# Altium PCB B213.PcbDoc
Units mm, origin at the board's own origin, x right, y up, seen from the top; angles counter-clockwise.
Board outline 22 x 40 mm, 4 copper layers (Top, Layer 1, Layer 2, Bottom), stack 1.564 mm thick; 29 components, 36 nets, 121 pads, 146 vias.
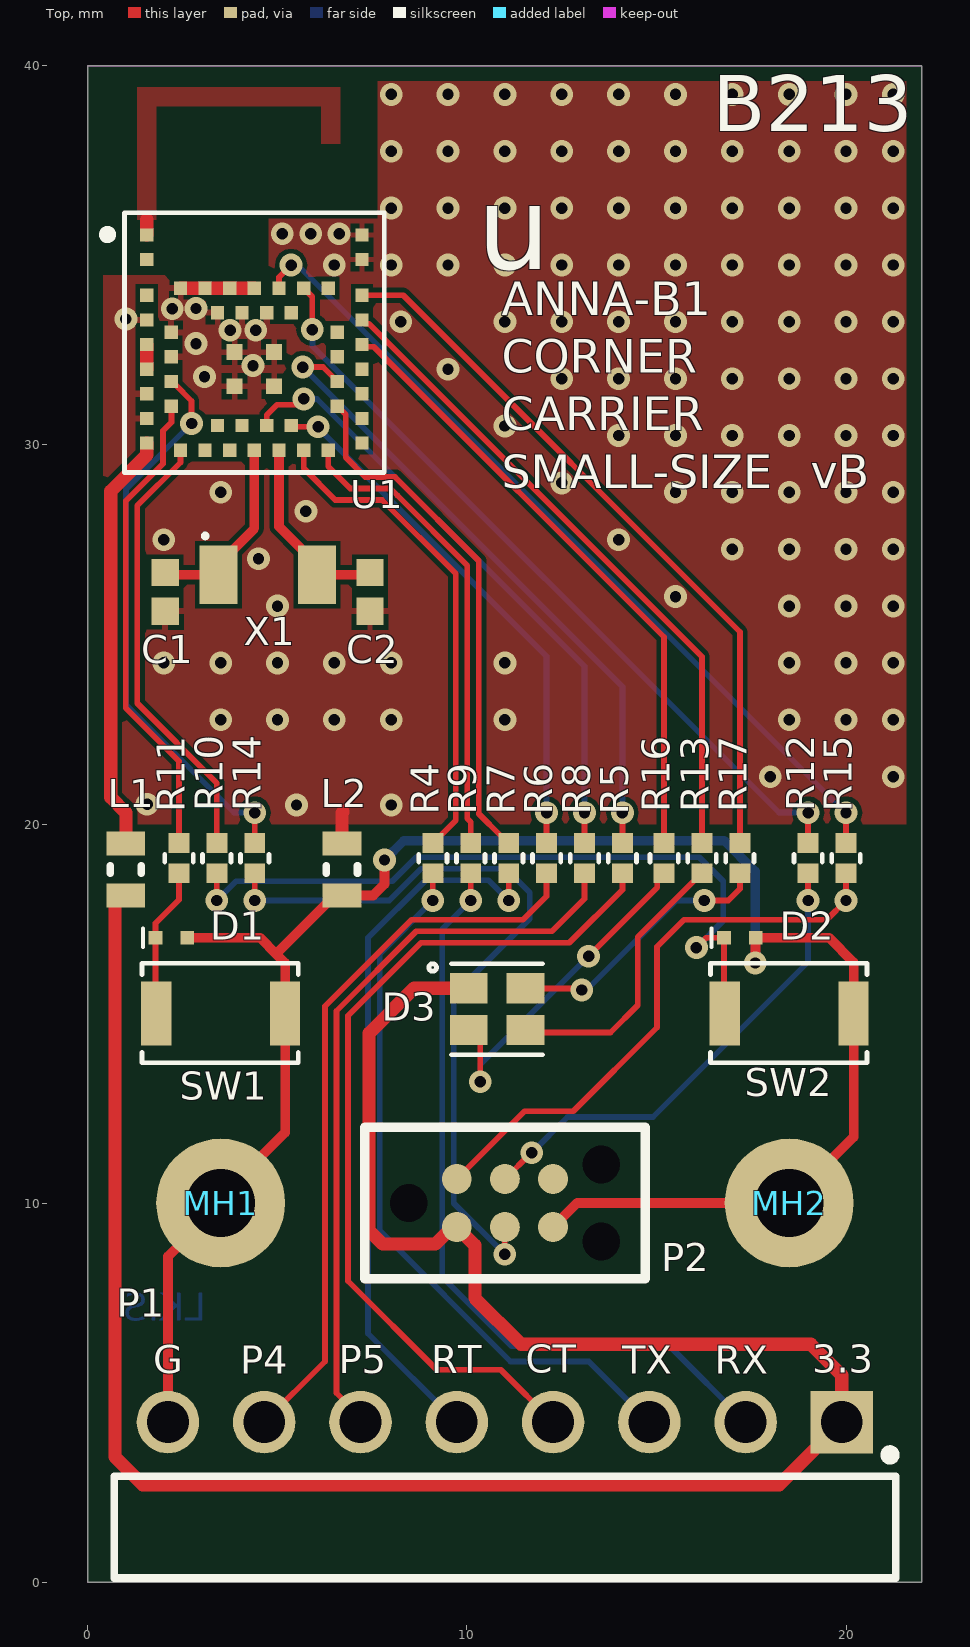
[diagram p0: Top view]
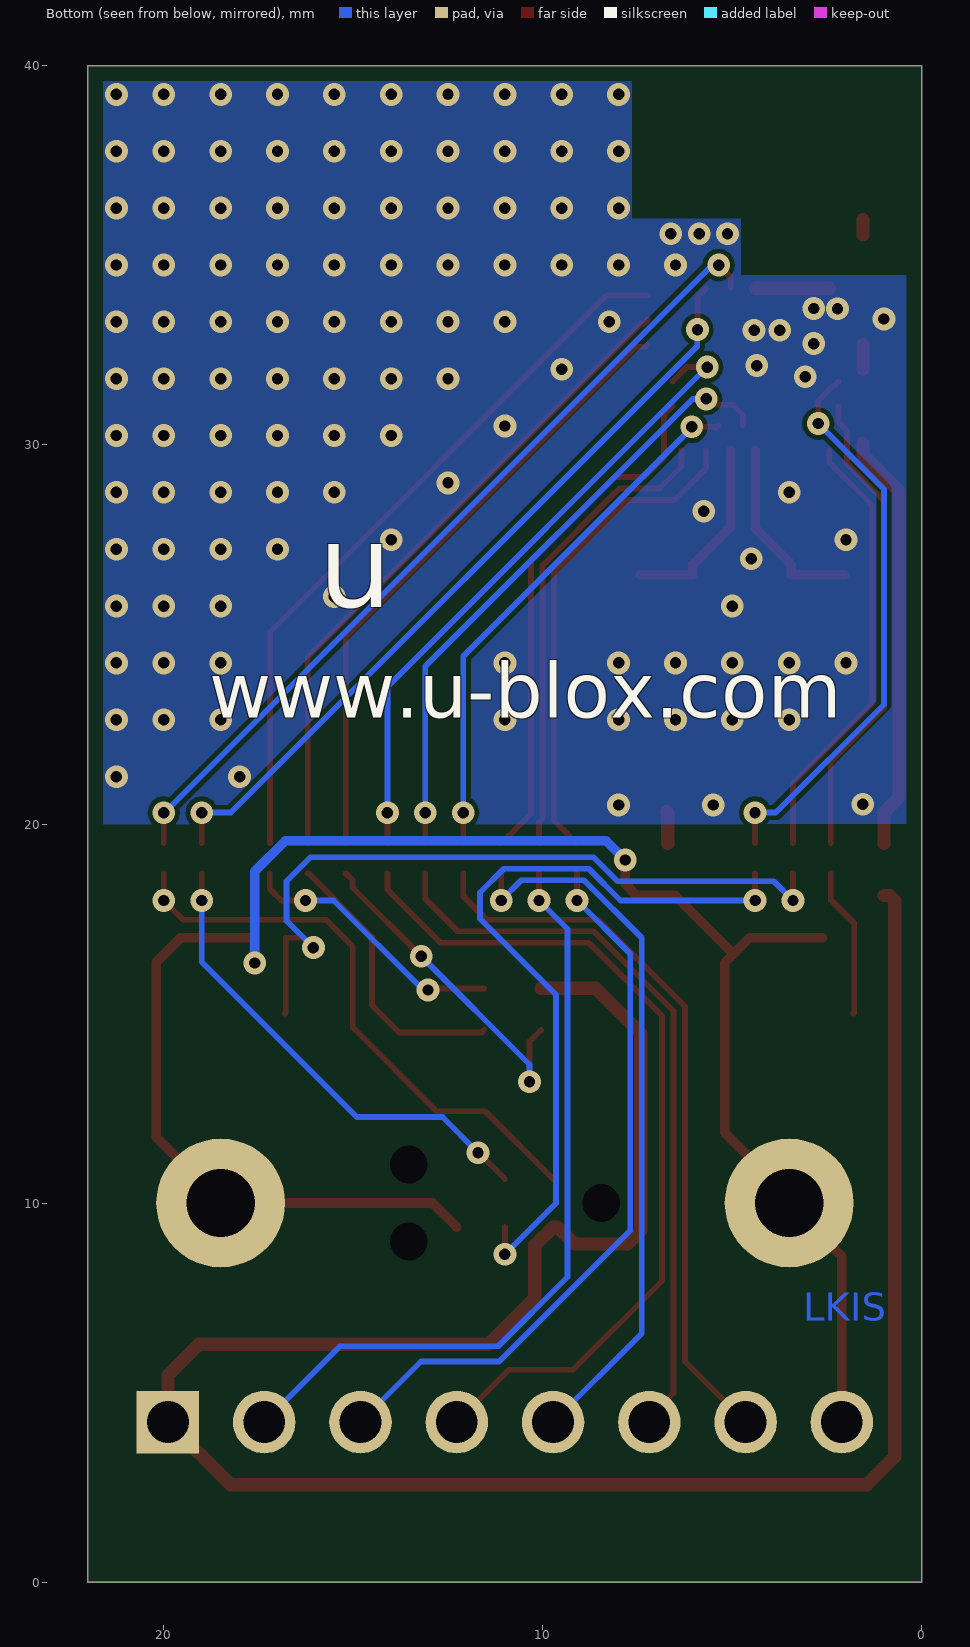
[diagram p1: Bottom view, seen from below]
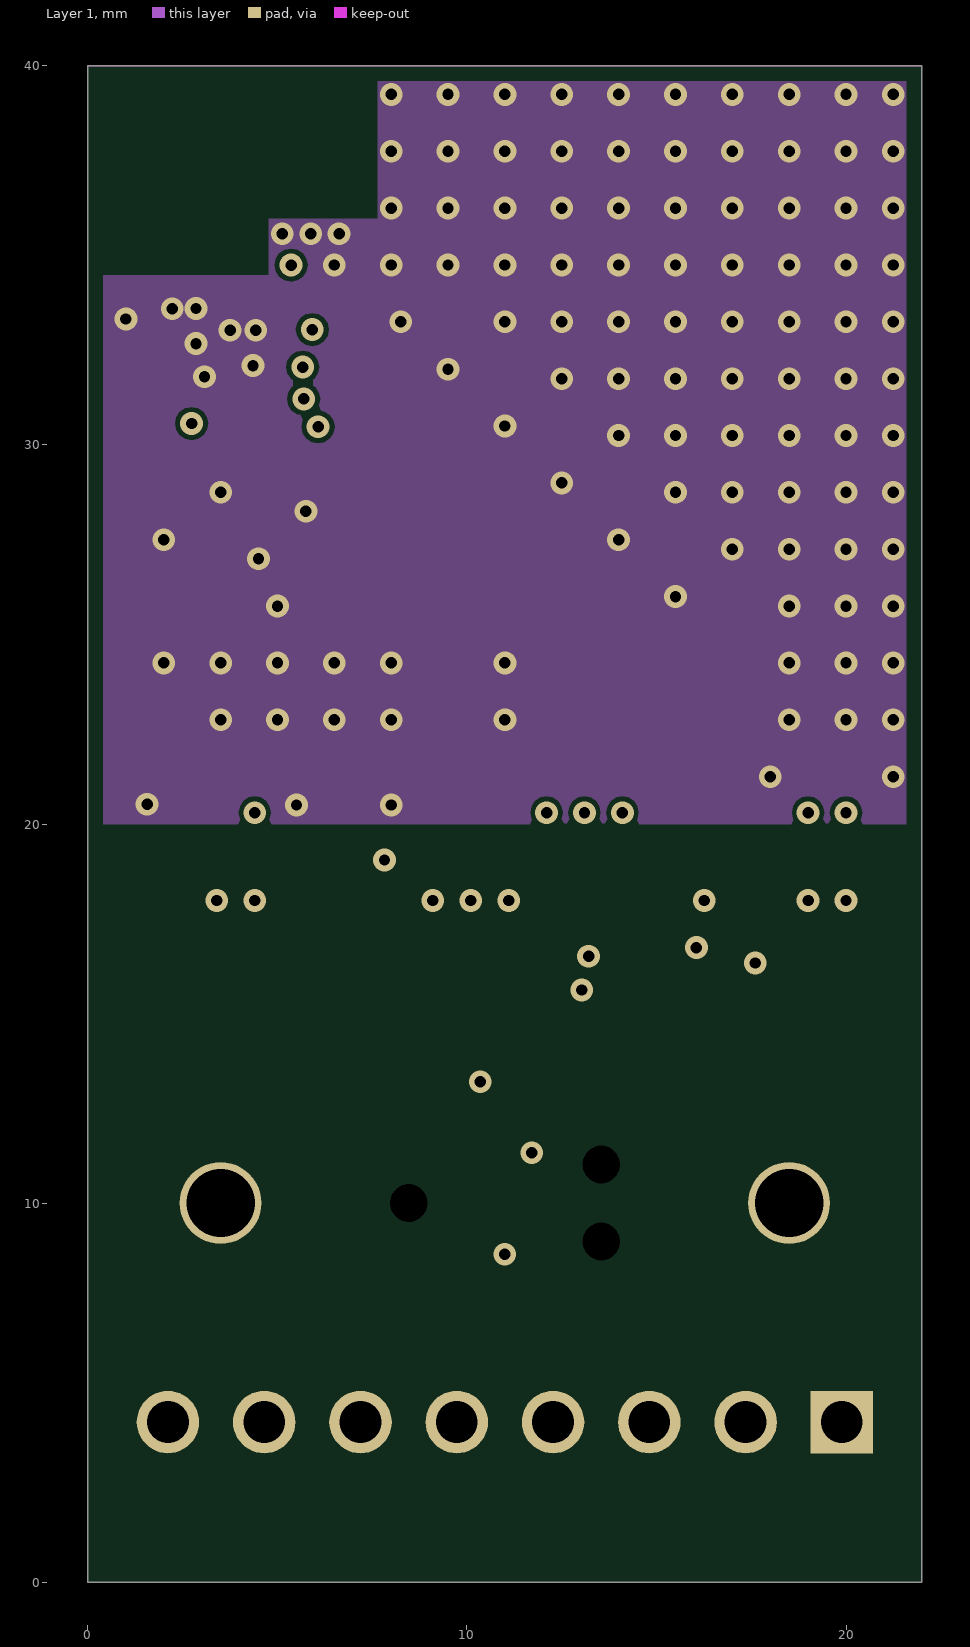
[diagram p2: Layer 1]
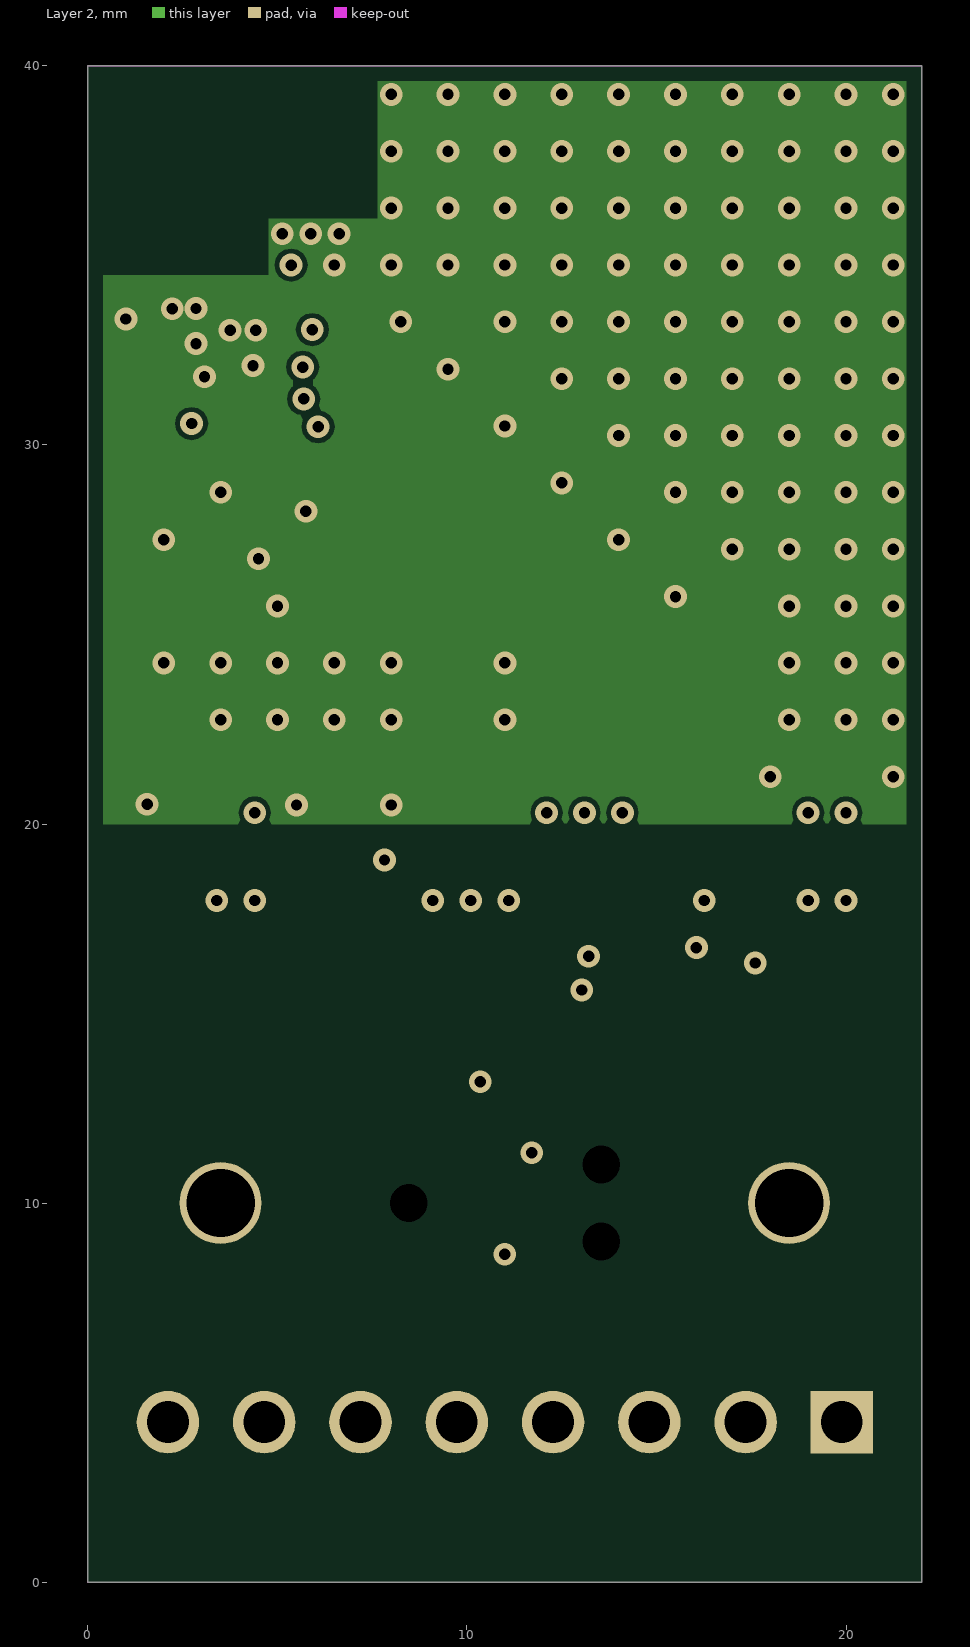
[diagram p3: Layer 2]

## Layer stack, top to bottom
Top Solder: solder mask 0.0203, Solder Resist, Dk 3.5
Top: signal copper 0.0406
Dielectric 1: prepreg 0.0711, PP-006, Dk 4.1
Layer 1: signal copper 0.035
Core: core 1.27, Core-043, Dk 4.3
Layer 2: signal copper 0.035
Dielectric 2: prepreg 0.0711, PP-006, Dk 4.1
Bottom: signal copper 0.0406
Bottom Solder: solder mask 0.0203, Solder Resist, Dk 3.5

## Board outline
0,0 0,40 22,40 22,0

## Design rules (kind name [scope] priority, off if disabled: settings)
BoardOutlineClearance [All] p1: gap=0.4 ignorepadtopadclearanceinfootprint=FALSE
Clearance "Stitching GND" [IsStitchingVia and InNet('GND') vs (IsVia and (Not IsStitchingVia)) Or IsPad] p1: gap=0.127 ignorepadtopadclearanceinfootprint=TRUE
Clearance Clearance_Poly [InPolygon vs OnLayer('Keep-Out Layer') OR (OnLayer('Multi-Layer') AND IsPad  AND Not(PadIsPlated))] p2: gap=0.127 ignorepadtopadclearanceinfootprint=TRUE
Clearance [All] p3: gap=0.127 ignorepadtopadclearanceinfootprint=FALSE except(0: Arc-Text Arc-Hole Track-Text Track-Hole SMDPad-Text SMDPad-Hole THPad-Text THPad-Hole Via-Text Via-Hole Fill-Text Fill-Hole Poly-Text Poly-Hole Region-Text Region-Hole Text-Text Text-Hole)
ComponentClearance [All] p1: gap=0.127 collisioncheckmode=3 verticalgap=0.254 showdistances=FALSE
DiffPairsRouting .14 [All] p1: maxlimit=0.254 minlimit=0.1 mostfreqgap=0.254 toplayer_maxgap=0.1 toplayer_prefgap=0.1 toplayer_minwidth=0.1 toplayer_maxwidth=0.1 toplayer_prefwidth=0.1 midlayer1_mingap=0.254 midlayer1_minwidth=0.381 midlayer1_maxwidth=0.381 midlayer1_prefwidth=0.381 midlayer2_mingap=0.254 midlayer2_minwidth=0.381 midlayer2_maxwidth=0.381 midlayer2_prefwidth=0.381 bottomlayer_maxgap=0.1 bottomlayer_prefgap=0.1 bottomlayer_minwidth=0.1 bottomlayer_maxwidth=0.1 bottomlayer_prefwidth=0.1 maxuncoupledlength=12.7
Height [All] p1: minheight=0 maxheight=25.4 prefheight=2.54
HoleSize [All] p1: absolutevalues=TRUE maxlimit=2540 minlimit=0.127 maxpercent=80.000 minpercent=20.000
HoleToHoleClearance [All] p1: gap=0.152 allowstackedmicrovias=TRUE
MinimumSolderMaskSliver [All] p1: minsoldermaskwidth=0.025
PlaneClearance [InPoly] p1: clearance=0.254
PlaneConnect [All] p1: pad.planeconnectstyle=Relief pad.reliefexpansion=0.508 pad.reliefentries=4 pad.reliefconductorwidth=0.254 pad.reliefairgap=0.254 via.planeconnectstyle=Direct via.reliefexpansion=0.508 via.reliefentries=4 via.reliefconductorwidth=0.254 via.reliefairgap=0.254
PolygonConnect ThermalVias [IsVia] p1: connectstyle=Direct reliefconductorwidth=0.254 reliefentries=4 polygonreliefangle="90 Angle" airgapwidth=0.254
PolygonConnect "PolygonConnect - Power" [InNetClass('')] p2: connectstyle=Relief reliefconductorwidth=0.254 reliefentries=4 polygonreliefangle="90 Angle" airgapwidth=0.127
PolygonConnect PolygonConnect-BGA [InComponentClass('')] p3: connectstyle=Relief reliefconductorwidth=0.152 reliefentries=4 polygonreliefangle="45 Angle" airgapwidth=0.152
PolygonConnect PolygonConnect-General [All] p4: connectstyle=Relief reliefconductorwidth=0.152 reliefentries=4 polygonreliefangle="90 Angle" airgapwidth=0.127
RoutingLayers [All] p1: top layer_v5=TRUE mid layer 1_v5=FALSE mid layer 2_v5=TRUE bottom layer_v5=TRUE
RoutingVias [All] p1: holewidth=0.3 width=0.6 viastyle="Through Hole" minholewidth=0.2 minwidth=0.5 maxholewidth=7 maxwidth=1
SMDEntry [All] p1 off: side=TRUE corner=TRUE anyangle=TRUE
SilkToBoardRegionClearance [All] p1 off:
SilkToSilkClearance [All] p1 off: silktosilkclearance=0.025
SilkToSolderMaskClearance [IsPad] p1 off: minsilkscreentomaskgap=0 clearancetoexposedcopper=TRUE
SolderMaskExpansion SolderMaskExpansion_via [IsVia] p1: expansion=-0.254 istentingtop=TRUE
SolderMaskExpansion [All] p2: expansion=0.05 istentingtop=FALSE
UnRoutedNet [All] p1: checkbadconnections=TRUE
ViasUnderSMD [All] p1: allowed=FALSE
Width [All] p1: maxlimit=2.54 minlimit=0.127 preferedwidth=0.152 toplayer_maxwidth=1 toplayer_prefwidth=0.152 bottomlayer_maxwidth=1 bottomlayer_prefwidth=0.152 minimp=50.000000 maximp=50.000000 favimp=50.000000
Width Width_1 [All] p2: maxlimit=0.254 minlimit=0.254 preferedwidth=0.254
17 further rules are at their usual default settings.

## Components (designator, comment, footprint, x,y, rotation, side; value= is the part's Value field where it differs from the comment)
C1 "Capacitor 10 pF +/- 5% 50 V 0402" CAPC1005X55X25ML05T05 2.04,26.125 r270 top value=10pF
C2 "Capacitor 10 pF +/- 5% 50 V 0402" CAPC1005X55X25ML05T05 7.44,26.125 r270 top value=10pF
D1 "110-00019" SOD-923 2.2,17 r0 top
D2 "110-00019" SOD-923 17.2,17 r0 top
D3 "115-00011" 4-PLCC 10.795,15.113 r180 top
L1 "LQW18AN56NJ00D" INDC1608X100X30LL20T10 1,18.8 r270 top
L2 "LQW18AN56NJ00D" INDC1608X100X30LL20T10 6.7,18.8 r90 top
MH1 "MH_M1.5DNP" MH_M1.5 3.5,10 r0 top
MH2 "MH_M1.5DNP" MH_M1.5 18.5,10 r0 top
P1 "61300811021" 61300811021 11,1.45 r0 top
P2 "TC2030-IDC-NLDNP" TC2030-IDC-NL 8.46,10 r0 top
R4 "" "RES 0402 HD" 9.1,19.1 r270 top value=220R
R5 "180-00098220R" "RES 0402 HD" 14.1,19.1 r270 top value=220R
R6 "180-00098220R" "RES 0402 HD" 12.1,19.1 r270 top value=220R
R7 "180-00098220R" "RES 0402 HD" 11.1,19.1 r270 top value=220R
R8 "180-00098220R" "RES 0402 HD" 13.1,19.1 r270 top value=220R
R9 "180-00098220R" "RES 0402 HD" 10.1,19.1 r270 top value=220R
R10 "180-00098220R" "RES 0402 HD" 3.4,19.1 r270 top value=220R
R11 "180-00098220R" "RES 0402 HD" 2.4,19.1 r270 top value=220R
R12 "180-00098220R" "RES 0402 HD" 19,19.1 r90 top value=220R
R13 "180-00098220R" "RES 0402 HD" 16.2,19.1 r270 top value=220R
R14 "180-00098220R" "RES 0402 HD" 4.4,19.1 r90 top value=220R
R15 "180-00098220R" "RES 0402 HD" 20,19.1 r90 top value=220R
R16 "180-00031499R" "RES 0402 HD" 15.2,19.1 r270 top value=499R
R17 "180-00098220R" "RES 0402 HD" 17.2,19.1 r270 top value=220R
SW1 "135-00007" B3U-1000P 3.5,15 r0 top
SW2 "135-00007" B3U-1000P 18.5,15 r0 top
U1 "ANNA-B112-OPENCPU" ANNA_LGA52S_650X650 4.39,32.702 r0 top
X1 "100-00005" XTAL_3215 4.74,26.575 r0 top

## Footprints (in the part's own frame and the unit in brackets; to place one, negate y for a bottom-side part, rotate by r counter-clockwise, add the part's x,y. Pads: shape width x height; smd on the part's side, far side on the other; paste and mask are expansions set on the pad)
4-PLCC [mm] "4 Pin Plastic Leaded Chip Carrier, 2mm x 2mm"
  rect 1x0.8 smd: 1(0.75,-0.55) 2(-0.75,-0.55) 3(-0.75,0.55) 4(0.75,0.55)
  silkscreen extent -1.2,-1.2 1.8,1.2, body extent -1.05,-1.05 1.05,1.05, height 1.01
61300811021 [mm]
  rect 1.65x1.65 hole 1.1: 1(8.89,2.77)
  round 1.65 hole 1.1: 2(6.35,2.77) 3(3.81,2.77) 4(1.27,2.77) 5(-1.27,2.77) 6(-3.81,2.77) 7(-6.35,2.77) 8(-8.89,2.77)
  silkscreen extent -10.31,-1.35 10.31,2.03, body extent -10.16,-7.27 10.16,3.09, height 2.58
ANNA_LGA52S_650X650 [mm]
  rect 0.35x0.35 smd paste+0 mask+0.05: 1(-2.84,2.84) 2(-2.84,2.19) 3(-2.84,1.248) 4(-2.84,0.598) 5(-2.84,-0.052) 6(-2.84,-0.702) 7(-2.84,-1.352) 8(-2.84,-2.002) 9(-2.84,-2.652) 10(-2.19,0.273) 11(-2.19,-0.377) 12(-2.19,-1.027) 13(-2.19,-1.677) 14(-1.95,-2.84) 15(-1.3,-2.84) 17(0,-2.84) 18(0.65,-2.84) 20(1.95,-2.84) 21(-0.975,-2.19) 23(0.325,-2.19) 24(0.975,-2.19) 25(2.84,-2.652) 26(2.84,-2.002) 27(2.84,-1.352) 28(2.84,-0.702) 29(2.84,-0.052) 30(2.84,0.598) 31(2.84,1.248) 32(2.84,2.19) 33(2.84,2.84) 34(2.19,-1.677) 35(2.19,-1.027) 36(2.19,-0.377) 37(2.19,0.273) 38(1.95,1.435) 39(1.3,1.435) 40(0.65,1.435) 41(0,1.435) 42(-0.65,1.435) 43(-1.3,1.435) 44(-1.95,1.435) 46(0.325,0.785) 48(-0.975,0.785)
  rect 0.35x0.35 smd mask+0.05: 16(-0.65,-2.84) 19(1.3,-2.84) 22(-0.325,-2.19) 45(0.975,0.785) 47(-0.325,0.785)
  rect 0.42x0.42 smd paste+0 mask+0.05: 49(-0.52,-0.252) 50(-0.52,-1.152) 51(0.52,-1.152) 52(0.52,-0.252)
  silkscreen extent -3.97,-3.42 3.42,3.43, body extent -3.25,-3.25 3.25,3.25, height 1.2
B3U-1000P [mm] "Button Tactile, SMT 4mm x 2.5mm, height 1.2mm"
  rect 0.8x1.7 smd: 1(-1.7,0) 2(1.7,0)
  silkscreen extent -2.07,-1.3 2.05,1.33, body extent -2,-1.25 2,1.25, height 1.6
CAPC1005X55X25ML05T05 [mm] "Chip Capacitor, 2-Leads, Body 1.05x0.55mm, IPC Low Density"
  rect 0.72x0.72 smd: 1(-0.51,0) 2(0.51,0)
  body extent -0.53,-0.28 0.53,0.28, height 0.55
INDC1608X100X30LL20T10 [mm] "Chip Inductor, 2-Leads, Body 1.8x1.1mm, IPC High Density"
  rect 0.64x1.02 smd: 1(-0.685,0) 2(0.685,0)
  silkscreen extent -0.1,-0.41 0.1,0.41, body extent -0.9,-0.55 0.9,0.55, height 1
MH_M1.5 [mm] "Mounting Hole M1.5 Metric, 3.4mm diameter pad"
  round 3.4 / inner round 2.159 / far side round 3.4 hole 1.8: 1(0,0)
"RES 0402 HD" [mm] "Chip Resistor, 2-Leads, Body 1.05x0.54mm, IPC High Density"
  rect 0.52x0.55 smd: 1(-0.4,0) 2(0.4,0)
  silkscreen extent -0.1,-0.38 0.1,0.38, body extent -0.55,-0.3 0.55,0.3, height 0.4
SOD-923 [mm] "SOD-923, 2-Leads, Body 1.25x2.50mm, IPC High Density,"
  rect 0.36x0.35 smd mask+0.05: 1(-0.42,0) 2(0.42,0)
  silkscreen extent -0.75,-0.25 -0.75,0.25, body extent -0.4,-0.3 0.4,0.3, height 0.4
TC2030-IDC-NL [mm] "Tag-Connect 6-Pin No Legs"
  round 0.9 hole 0.995 unplated: 0(0,0) 0(5.08,-1.016) 0(5.08,1.016)
  round 0.79 smd paste-0.39: 1(1.27,-0.635) 2(1.27,0.635) 3(2.54,-0.635) 4(2.54,0.635) 5(3.81,-0.635) 6(3.81,0.635)
  silkscreen extent -1.16,-2 6.24,2
XTAL_3215 [mm] "XTAL, 2-Leads, Body 1.50x3.20mm"
  rect 1x1.55 smd: 1(-1.3,0) 2(1.3,0)
  silkscreen extent -1.7,0.98 -1.6,1.07, body extent -1.65,-0.8 1.65,0.8, height 0.9

## Part data
C1 C2: library part CMP-001-00013-4, "Chip Capacitor, 10 pF, +/- 5%, 50 V, 0402 (1005 Metric)", Capacitor Type=Ceramic, Case/Package=0402, Max Operating Temperature=125°C, Min Operating Temperature=-55°C, Tolerance=5%, Voltage Rating=50V, Mounting Technology=SM, Pins=2, RoHS Compliant=True
D1 D2: "Diode, ESD9B, 3.3V, ST5G, SOD-923", Manufacturer="ON Semiconductor", Manufacturer P/N=ESD9B3.3ST5G, MFG Package=SOD-923, Package Type=SOD, Part Name="Diode TVS 3.3V SOD-923", Voltage=3.3V, Arena Link=https://app.bom.com/a/4M5DJQ9Q9SR7DV4H?v=spec.summary, Body Size="0.8mm x 0.6mm", Component Mounting Type=SMT, Diode Type=TVS, Height=0.4mm, Item_Phase=Production, Part Number=110-00019, Part_Type=Diode, Pins=2, Revision=0A, Supplier 1=Arrow, Supplier Part Number 1=ESD9B3.3ST5G, Use in new designs=Yes
D3: "LED, RGB Diffused SMT, PLCC4 4 Pin", Color=RGB, Current="20mA Red, 10mA Green, 10mA, Blue", Manufacturer="Cree, Inc.", Manufacturer P/N=CLMVB-FKA-CFHEHLCBB7a363, MFG Package=PLCC4, Package Type=Custom, Part Name="LED RGB SMT 2mm x 2mm", Supplier Part Number 1=941-CLMVBFKACFHEHLCB, Voltage=5V, Arena Link=https://app.bom.com/a/UCV39GZGZIHY581D?v=spec.summary, Body Size="2.0mm x 2.0mm", Component Mounting Type=SMT, Height=1mm, Item_Phase=Production, Mounting Type=Vertical, Number of Circuits=3, Part Number=115-00011, Part_Type=LED, Pins=4, Revision=0A, Supplier 1=Mouser, Use in new designs=Yes, Vf="2V Red, 3V Green, 3V Blue"
L1 L2: library part CMP-2000-06600-1, "Chip Inductor, 56 nH, +/-5%, 390 mA, -55 to 125 degC, 0603 (1608 Metric), RoHS, Tape and Reel", Current Rating=360mA, DC Resistance (DCR)=290mOhmMax, Frequency - Self Resonant=2.4GHz, Frequency - Test=100MHz, Inductance=56nH, Manufacturer=Murata, Operating Temperature=-55°C~125°C, Package / Case=0603(1608Metric), Package Description="2-Pin Surface Mount Device, Body 1.6 x 0.8 mm", Package Reference=0603, Q @ Freq=38@200MHz, Standard Package=1, Tolerance=±5%, Category=Inductors,Coils,Chokes, Datasheet URL=http://search.murata.co.jp/Ceramy/image/img/PDF/ENG/L0075S0080LQW18A_10.pdf, Datasheet Version=1/2019, Family=FixedInductors, Height - Seated (Max)="0.039\"(1.00mm)", Manufacturer URL=http://www.murata.com/, Material - Core=Non-Magnetic, Mounting Technology=SurfaceMount, Mounting Type=SurfaceMount, Online Catalog=LQWSeries, Other Names=490-6876-1, Packaging=CutTape(CT), Product Training Modules=InductorProductsChipRFInductors, Series=LQW18A_00, Shielding=Unshielded, Size / Dimension="0.063\"Lx0.031\"W(1.60mmx0.80mm)", Type=Wirewound
MH1 MH2: library part MH_M1.5, "1.5M screw mounting hole, plated", Added By="Jeremy D", Added Date=2015-07-09, DNP=DNP, Height=0mm, Part Number=MH_M1.5, Size="3.4mm x 3.4mm", Type="Mounting Hole"
P1: library part CMP-1502-01075-1, "THT Angled Pin Header WR-PHD, Pitch 2.54 mm, Single Row, 8 pins", Contact Resistance=20mOhm, Manufacturer="Wurth Elektronik", Operating Temperature=-40to105degC, Rated Current=3A, Withstanding Voltage=500VAC, Working Voltage=250VAC, Datasheet URL=https://katalog.we-online.de/em/datasheet/6130xx11021.pdf, Gender=Male, Manufacturer Part Number=61300811021, Manufacturer URL=http://www.we-online.de, Mounting Technology=THT, Orientation=Angled, Package Reference=61300811021, Packaging=Bag, Part Number=61300811021, Pin Number=8, Pitch=2.54mm, Publisher=WurthElektronik, Row Number=Single
P2: library part TC2030-IDC-NL, "CON PADS FOR CBL PLUG-OF-NAILS 6-PIN NO LEGS", Manufacturer="TAG Connect", Added By="Paul B", Added Date=2015-04-22, DNP=DNP, Height=0, Manufacturer P/N=TC2030-IDC-NL, Part Number=TC2030-IDC-NL, Size="6.731mm x 12.446mm"
R4 R5 R6 R7 R8 R9 R10 R11 R12 R14 R15: library part 180-00098, "Resistor, 220ohm, 5%, 1/16W, 0402.", Manufacturer 1="Samsung Electro-Mechanics America, Inc", Manufacturer 2="Panasonic Electronic Components", Manufacturer Part Number 1=RC1005J221CS, Manufacturer Part Number 2=ERJ-2GEJ221X, Max Operating Temp=155, Min Operating Temp=-55, Part Name="RES SMD 220 OHM 5% 1/16W 0402", Power=1/16W, Supplier Part Number 1=1276-4360-1-ND, Tolerance="+/- 5%", Voltage=None, Height=0.4mm, Item Phase="In Production", Part Number=180-00098, Pins=2, Revision=0C, Size=0402, Supplier 1=Digi-Key, Supplier 2=Digi-Key, Supplier Part Number 2=P220JCT-ND, UBX Code=None, Use in new designs=Yes
R13 R17: library part 180-00098, "Resistor, 220ohm, 5%, 1/16W, 0402.", Manufacturer="Panasonic Electronic Components", Manufacturer 2="Samsung Electro-Mechanics America, Inc", Manufacturer P/N=ERJ-2GEJ221X, Manufacturer P/N 2=RC1005J221CS, Part Name="RES SMD 220 OHM 5% 1/16W 0402", Power=1/16W, Supplier Part Number 1=P220JCT-ND, Tolerance="+/- 5%", Alternate Footprint Ref="RES 0402", Arena Link=https://app.bom.com/a/8Q9HNUDUDWVBJC30?v=spec.summary, Component Mounting Type=SMT, Height=0.4mm, Item_Phase=Production, Part Number=180-00098, Part_Type=Resistor, Pins=2, Revision=0C, Size=0402, Supplier 1=Digi-Key, Supplier 2=Digi-Key, Supplier Part Number 2=1276-4360-1-ND, Use in new designs=Yes
R16: library part 180-00031, "Resistor, 499ohm, 1%, 1/16W, 0402", Manufacturer="Rohm Semiconductor", Manufacturer 2="Samsung Electro-Mechanics America, Inc", Manufacturer P/N=MCR01MRTF4990, Manufacturer P/N 2=RC1005F4990CS, Part Name="RES SMD 499 OHM 1% 1/16W 0402", Power=1/16W, Supplier Part Number 1=RHM499CDCT-ND, Tolerance="+/- 1%", Alternate Footprint Ref="RES 0402", Arena Link=https://app.bom.com/a/Q8RZ5CVCVEDU1SS5?v=spec.summary, Component Mounting Type=SMT, Height=0.4mm, Item_Phase=Production, Part Number=180-00031, Part_Type=Resistor, Pins=2, Revision=0D, Size=0402, Supplier 1=Digi-Key, Supplier 2=Digi-Key, Supplier Part Number 2=1276-3992-1-ND, Use in new designs=Yes
SW1 SW2: "Button, Momentary SPST-NO, 0.05A, 12V, 3mm x 2.5mm", Current=50mA, Manufacturer="Omron Electronics Inc-EMC Div", Manufacturer P/N=B3U-1000P, Part Name="SWITCH TACTILE SPST-NO 0.05A 12V", Supplier Part Number 1=SW1020CT-ND, Voltage=12VDC, Arena Link=https://app.bom.com/a/TBU28FYFYHGV5FQ0?v=spec.summary, Body Size="3mm x 2.5mm", Component Mounting Type=SMT, Height=1.2mm, Item_Phase=Production, Part Number=135-00007, Part_Type=Button, Pins=2, Revision=0A, Supplier 1=Digi-Key, Switch/Button Circuit=SPST, Switch/Button Function=Off-Mom, Use in new designs=Yes
U1: "u-blox ANNA-B112 Bluetooth 5 LE module", Manufacturer=u-blox, Part Description="Stand-alone Bluetooth low energy module"
X1: "XTAL, 2Pin, 32.768kHz, 7pF 20ppm", Frequency=32.768kHz, Frequency Tolerance=20ppm, Manufacturer=Epson, Manufacturer 2="AVX Corporation", Manufacturer P/N="FC-135 32.7680KA-AG3", Manufacturer P/N 2=ST3215SB32768C0HPWBB, MFG Package=2-SMD, Part Name="XTAL 32.768kHz 7pF 20ppm 3215", Supplier Part Number 1=SER4086CT-ND, Arena Link=https://app.bom.com/a/L3MU07Q7Q98O5PC8?v=spec.summary, Body Size="3.2mm x 1.5mm", CL=7pF, Component Mounting Type=SMT, Height=0.9mm, Item_Phase=Production, Part Number=100-00005, Part_Type=Crystal/Oscillator, Pins=2, Revision=0C, Supplier 1=Digi-Key, Supplier 2=Digi-Key, Supplier Part Number 2=1253-1113-1-ND, Use in new designs=Yes

## Via types
v1: diameter 0.6, hole 0.3, Top to Bottom, tented both sides, 146 vias

## Nets (pads, with @x,y where several pads share a name; then routed paths per layer and width w, separated by ;. In a path a pad name is that pad's centre, name@x,y a point inside that pad or via, vN(x,y) a via of type N, cw(c..) or ccw(c..) an arc to the next point about the centre after c; other vN are vias at no path point)
3V3: D3.1 L1.2 P1.1 P2.1 | length 60
  Top w0.35: L1.2 0.856,18.115 0.711,17.97 0.711,3.302 1.448,2.565 18.235,2.565 P1.1 19.89,5.459 19.075,6.274 11.43,6.274 10.211,7.493 10.211,8.884 P2.1 9.611,9.365 9.161,8.915 7.772,8.915 7.417,9.271 7.417,14.478 8.602,15.663 D3.1
3V3_M: L1.1 U1.9 | length 11.1
  Top w0.35: L1.1 1,20.3 0.6,20.7 0.6,28.786 1.55,29.736 U1.9
ANT_HOST_CORNER: U1.1 | length 0.4
  Top w0.35: U1.1 1.55,35.942
ANT_INT_CORNER: U1.5 U1.6 | length 0.6
  Top w0.35: U1.6 U1.5
B_M: R17.1 U1.31 | length 19.2
  Top w0.152: U1.31 8.316,33.95 17.2,25.066 R17.1
BLUE: D3.2 R17.2 | length 7.2
  Top w0.152: D3.2 v1@12.958,15.663 ; v1(16.26,17.983) 16.895,17.983 17.204,18.292 R17.2@17.204,18.7
  Bottom w0.152: v1(13.03,15.621) 12.979,15.672 13.208,15.672 15.519,17.983 v1@16.256,17.983
BT1_M: R11.1 U1.13 | length 12.6
  Top w0.152: U1.13 2.2,30.6 1.977,30.377 1.977,29.507 0.996,28.526 0.996,23.058 2.4,21.654 R11.1
BT2_M: R10.1 U1.14 | length 11.7
  Top w0.152: U1.14 2.44,29.54 1.3,28.4 1.3,23.184 3.4,21.084 R10.1
BUTTON1: D1.1 R11.2 SW1.1 | length 4
  Top w0.152: SW1.1 1.78,15.02 D1.1 1.78,17.38 2.4,18 R11.2
BUTTON2: D2.1 R10.2 SW2.1 | length 19.7
  Top w0.152: v1(3.399,17.983) R10.2@3.399,18.699 ; v1(16.053,16.739) 16.314,17 D2.1 16.78,15.02 SW2.1
  Bottom w0.152: v1(3.399,17.983) 3.907,18.491 8.026,18.491 8.66,19.125 16.131,19.125 16.764,18.491 16.764,17.45 v1(16.053,16.739)
CLK1: C1.1 U1.17 X1.1 | length 5.1
  Top w0.254: C1.1@2.04,26.575 X1.1 3.44,26.85 4.39,27.8 U1.17
CLK2: C2.1 U1.18 X1.2 | length 5.1
  Top w0.254: U1.18 5.04,27.85 6.04,26.85 X1.2 C2.1@7.44,26.575
CTS: P1.4 R5.2 | length 23
  Top w0.152: P1.4 10.89,5.6 9.2,5.6 6.858,7.942 6.858,14.939 8.785,16.866 12.7,16.866 14.1,18.266 R5.2
CTS_M: R5.1 U1.35 | length 17.1
  Top w0.152: v1(5.664,32.055) 6.2,32.055 U1.35 ; R5.1 v1(14.1,20.3)
  Bottom w0.152: v1(5.664,32.055) 14.1,23.619 v1(14.1,20.3)
G_M: R13.1 U1.30 | length 17.6
  Top w0.152: U1.30 7.329,33.201 7.414,33.201 16.2,24.415 R13.1
GND: D1.2 D2.2 L2.1 MH1.1 MH2.1 P1.8 P2.5 SW1.2 SW2.2 | length 50.3
  Top w0.254: P1.8 2.11,8.591 3.5,9.981 MH1.1 3.5,10.162 5.2,11.862 SW1.2 5.2,16.339 4.978,16.561 ; D1.2 4.539,17 4.978,16.561 ; v1(7.823,19.05) 7.823,18.415 7.523,18.115 L2.1 6.51,18.115 4.978,16.583 4.978,16.561 ; P2.5 12.905,10 MH2.1 18.5,10.036 20.2,11.736 SW2.2 20.2,16.351 19.551,17 D2.2 17.611,16.991 17.611,16.341 v1(17.602,16.332)
  Bottom w0.254: v1(7.823,19.05) 8.331,19.558 16.789,19.558 17.602,18.745 v1(17.602,16.332)
GND_M: C1.2 C2.2 L2.2 U1.4 U1.7 U1.8 U1.10 U1.11 U1.32 U1.33 U1.41 U1.42 U1.43 U1.44 U1.46 U1.47 U1.48 U1.49 U1.50 U1.51 U1.52 | length 2.8
  Top w0.35: U1.44 U1.43 U1.42 U1.41 ; v1(2.85,33.6) v1@2.88,33.63 ; L2.2 6.7,20.289 6.731,20.32
  other v1: 5.5,20.5 8,20.5 1.559,20.524 18,21.25 21.25,21.25 3.5,22.75 5,22.75 6.5,22.75 8,22.75 11,22.75 18.5,22.75 20,22.75 21.25,22.75 2,24.25 3.5,24.25 5,24.25 6.5,24.25 8,24.25 11,24.25 18.5,24.25 20,24.25 21.25,24.25 5,25.75 18.5,25.75 20,25.75 21.25,25.75 15.5,26 4.5,27 17,27.25 18.5,27.25 20,27.25 21.25,27.25 2,27.5 14,27.5 5.75,28.25 3.5,28.75 15.5,28.75 17,28.75 18.5,28.75 20,28.75 21.25,28.75 12.5,29 14,30.25 15.5,30.25 17,30.25 18.5,30.25 20,30.25 21.25,30.25 11,30.5 12.5,31.75 14,31.75 15.5,31.75 17,31.75 18.5,31.75 20,31.75 21.25,31.75 3.073,31.801 9.5,32 4.354,32.096 2.85,32.675 3.75,33.025 4.425,33.025 8.25,33.25 11,33.25 12.5,33.25 14,33.25 15.5,33.25 17,33.25 18.5,33.25 20,33.25 21.25,33.25 1,33.325 2.225,33.596 6.5,34.75 8,34.75 9.5,34.75 11,34.75 12.5,34.75 14,34.75 15.5,34.75 17,34.75 18.5,34.75 20,34.75 21.25,34.75 5.125,35.575 5.875,35.575 6.625,35.575 8,36.25 9.5,36.25 11,36.25 12.5,36.25 14,36.25 15.5,36.25 17,36.25 18.5,36.25 20,36.25 21.25,36.25 8,37.75 9.5,37.75 11,37.75 12.5,37.75 14,37.75 15.5,37.75 17,37.75 18.5,37.75 20,37.75 21.25,37.75 8,39.25 9.5,39.25 11,39.25 12.5,39.25 14,39.25 15.5,39.25 17,39.25 18.5,39.25 20,39.25 21.25,39.25
GREEN: D3.3 R13.2 | length 7.5
  Top w0.152: D3.3 11.608,14.5 13.785,14.5 14.503,15.218 14.503,17.018 16.185,18.7 R13.2
nRESET: P2.3 R14.1 | length 20.2
  Top w0.152: v1(4.399,17.983) R14.1 ; v1(10.999,8.648) P2.3@10.999,9.364
  Bottom w0.152: v1(4.399,17.983) 7.948,17.983 8.786,18.821 11.029,18.821 11.659,18.191 11.659,17.501 9.651,15.494 9.651,9.996 v1(10.999,8.648)
nRST_M: R14.2 U1.12 | length 14.9
  Top w0.152: U1.12 2.299,31.576 2.321,31.576 2.734,31.163 v1(2.734,30.566) ; R14.2 v1(4.4,20.3)
  Bottom w0.152: v1(2.734,30.566) 1,28.832 1,23.155 3.855,20.3 v1(4.4,20.3)
P0.04: P1.7 R6.2 | length 19.3
  Top w0.152: P1.7 6.25,5.82 6.25,15.191 8.534,17.475 11.481,17.475 12.1,18.094 R6.2
P0.04_M: R6.1 U1.24 | length 14.2
  Top w0.152: U1.24 5.427,30.45 5.457,30.48 v1(6.071,30.48) ; R6.1 v1(12.1,20.3)
  Bottom w0.152: v1(6.071,30.48) 6.071,30.454 12.1,24.425 v1(12.1,20.3)
P0.05: P1.6 R8.2 | length 19.6
  Top w0.152: P1.6 7.19,4.351 6.554,4.987 6.554,15.065 8.66,17.17 12.243,17.17 13.1,18.028 R8.2
P0.05_M: R8.1 U1.23 | length 16.4
  Top w0.152: U1.23 4.715,30.79 4.986,31.061 5.534,31.061 v1(5.69,31.217) ; R8.1 v1(13.1,20.3)
  Bottom w0.152: v1(5.69,31.217) 6.045,31.217 13.1,24.162 v1(13.1,20.3)
R_M: R16.1 U1.29 | length 16.6
  Top w0.152: U1.29 7.288,32.592 7.54,32.592 15.2,24.932 R16.1
RED: D3.4 R16.2 | length 9
  Top w0.152: D3.4 10.35,14.258 v1(10.35,13.2) ; v1(13.208,16.51) 15.022,18.324 15.022,18.522 R16.2 R16.2@15.213,18.687
  Bottom w0.152: v1(10.35,13.2) 10.35,13.652 v1(13.208,16.51)
RTS: P1.5 R7.2 | length 19
  Top w0.152: v1(11.099,17.983) R7.2
  Bottom w0.152: P1.5 7.391,6.559 7.391,16.996 8.912,18.517 10.566,18.517 v1(11.099,17.983)
RTS_M: R7.1 U1.34 | length 13.9
  Top w0.152: U1.34 6.8,30.805 6.8,29.675 7.317,29.158 8.102,29.158 10.312,26.947 10.312,20.269 10.898,19.684 10.916,19.684 R7.1
RXD: P1.2 R9.2 | length 20.6
  Top w0.152: v1(10.099,17.983) R9.2
  Bottom w0.152: v1(10.099,17.983) 9.347,17.231 9.347,8.049 11.175,6.222 15.348,6.222 P1.2
RXD_M: R9.1 U1.20 | length 12.5
  Top w0.152: U1.20 6.34,29.435 6.921,28.854 7.976,28.854 8.165,28.665 10.008,26.822 10.008,20.143 10.1,20.052 R9.1
SWCLK: P2.4 R12.1 | length 12.7
  Top w0.152: P2.4 11.693,11.328 v1(11.709,11.328) ; v1(18.999,17.983) R12.1
  Bottom w0.152: v1(11.709,11.328) 12.649,12.268 14.91,12.268 18.999,16.358 v1(18.999,17.983)
SWCLK_M: R12.2 U1.39 | length 20.6
  Top w0.152: U1.39 5.918,33.909 v1(5.918,33.045) ; R12.2 v1(19,20.3)
  Bottom w0.152: v1(5.918,33.045) 5.924,33.04 5.924,32.608 18.232,20.3 v1(19,20.3)
SWDIO: P2.2 R15.1 | length 15.3
  Top w0.152: P2.2 11.516,12.421 12.802,12.421 15.011,14.63 15.011,16.764 15.723,17.475 19.491,17.475 v1(19.999,17.983) R15.1
SWDIO_M: R15.2 U1.40 | length 22.2
  Top w0.152: U1.40 5.04,34.428 v1(5.359,34.747) ; R15.2 v1(20,20.3)
  Bottom w0.152: v1(5.359,34.747) 5.528,34.747 19.975,20.3 v1(20,20.3)
TXD: P1.3 R4.2 | length 19.2
  Top w0.152: v1(9.099,17.983) R4.2@9.099,18.699
  Bottom w0.152: v1(9.099,17.983) 7.695,16.579 7.695,9.271 11.15,5.817 13.213,5.817 P1.3
TXD_M: R4.1 U1.19 | length 13
  Top w0.152: U1.19 5.69,29.385 6.525,28.55 7.761,28.55 9.703,26.608 9.703,20.091 9.299,19.688 9.299,19.684 9.115,19.5 R4.1
pads on no net: P2.0 P2.6 U1.2 U1.3 U1.15 U1.16 U1.21 U1.22 U1.25 U1.26 U1.27 U1.28 U1.36 U1.37 U1.38 U1.45

## Polygon pours and split planes (outlines as drawn)
ANT_HOST_CORNER on Top "ANT_HOST_CORNER_L01_P013" (solid, pour order 13): 1.8,35.942 1.3,35.942 1.3,39.442 6.65,39.442 6.65,37.942 6.15,37.942 6.15,38.942 1.8,38.942
GND_M on Top "GND_M_L01_P015" (solid, remove dead copper, pour order 15): 0,20 0,34.475 4.775,34.475 4.775,35.975 7.65,35.975 7.65,40 22,40 22,20
GND_M on Bottom "GND_M_L04_P014" (solid, remove dead copper, pour order 14): 0,20 0,34.475 4.775,34.475 4.775,35.975 7.65,35.975 7.65,39.95 22,39.95 22,20
GND_M on Layer 1 "GND_M_L02_P016" (solid, pour order 16): 0,20 0,34.475 4.775,34.475 4.775,35.975 7.65,35.975 7.65,39.95 22,39.95 22,20
GND_M on Layer 2 "GND_M_L03_P017" (solid, pour order 17): 0.075,20 0.075,34.475 4.775,34.475 4.775,35.975 7.65,35.975 7.65,39.95 22,39.95 22,20

## Keep-outs
Keep-Out Layer:
  the board outline again, w0.025

## Other copper
Top:
  pour cut-out: 9.713,9.737 9.713,10.262 10.088,10.637 11.913,10.637 12.263,10.288 12.263,9.712 11.918,9.367 10.083,9.367 10.013,9.437
Bottom:
  pour cut-out: 0.652,6.426 0.652,7.476 3.277,7.476 3.277,6.426
  text "LKIS" at 3.122,6.64 h1.27

## Silkscreen, mask and mechanical layers (free items; w line width, h text height)
Top Overlay:
  text "B213" at 16.487,37.791 h2.54
  text "u" at 10.276,33.91 h3.81
  text "ANNA-B1 / CORNER / CARRIER / SMALL-SIZE" at 10.922,28.575 h1.52
  text "vB" at 19.075,28.575 h1.52
  text "G" at 1.724,5.263 h1.27
  text "P5" at 6.618,5.263 h1.27
  text "RT" at 9.054,5.258 h1.27
  text "CT" at 11.552,5.271 h1.27
  text "3.3" at 19.111,5.265 h1.27
  text "P4" at 4.022,5.25 h1.27
  text "TX" at 14.092,5.25 h1.27
  text "RX" at 16.535,5.25 h1.27
Bottom Overlay:
  text "u" at 15.913,24.994 h3.81
  text "www.u-blox.com" at 18.796,22.31 h2.5
Route Tool Path:
  the board outline again, w0.127